# EAGLE board DP_eDP_Adapter_v2.0 (EAGLE 6.4)
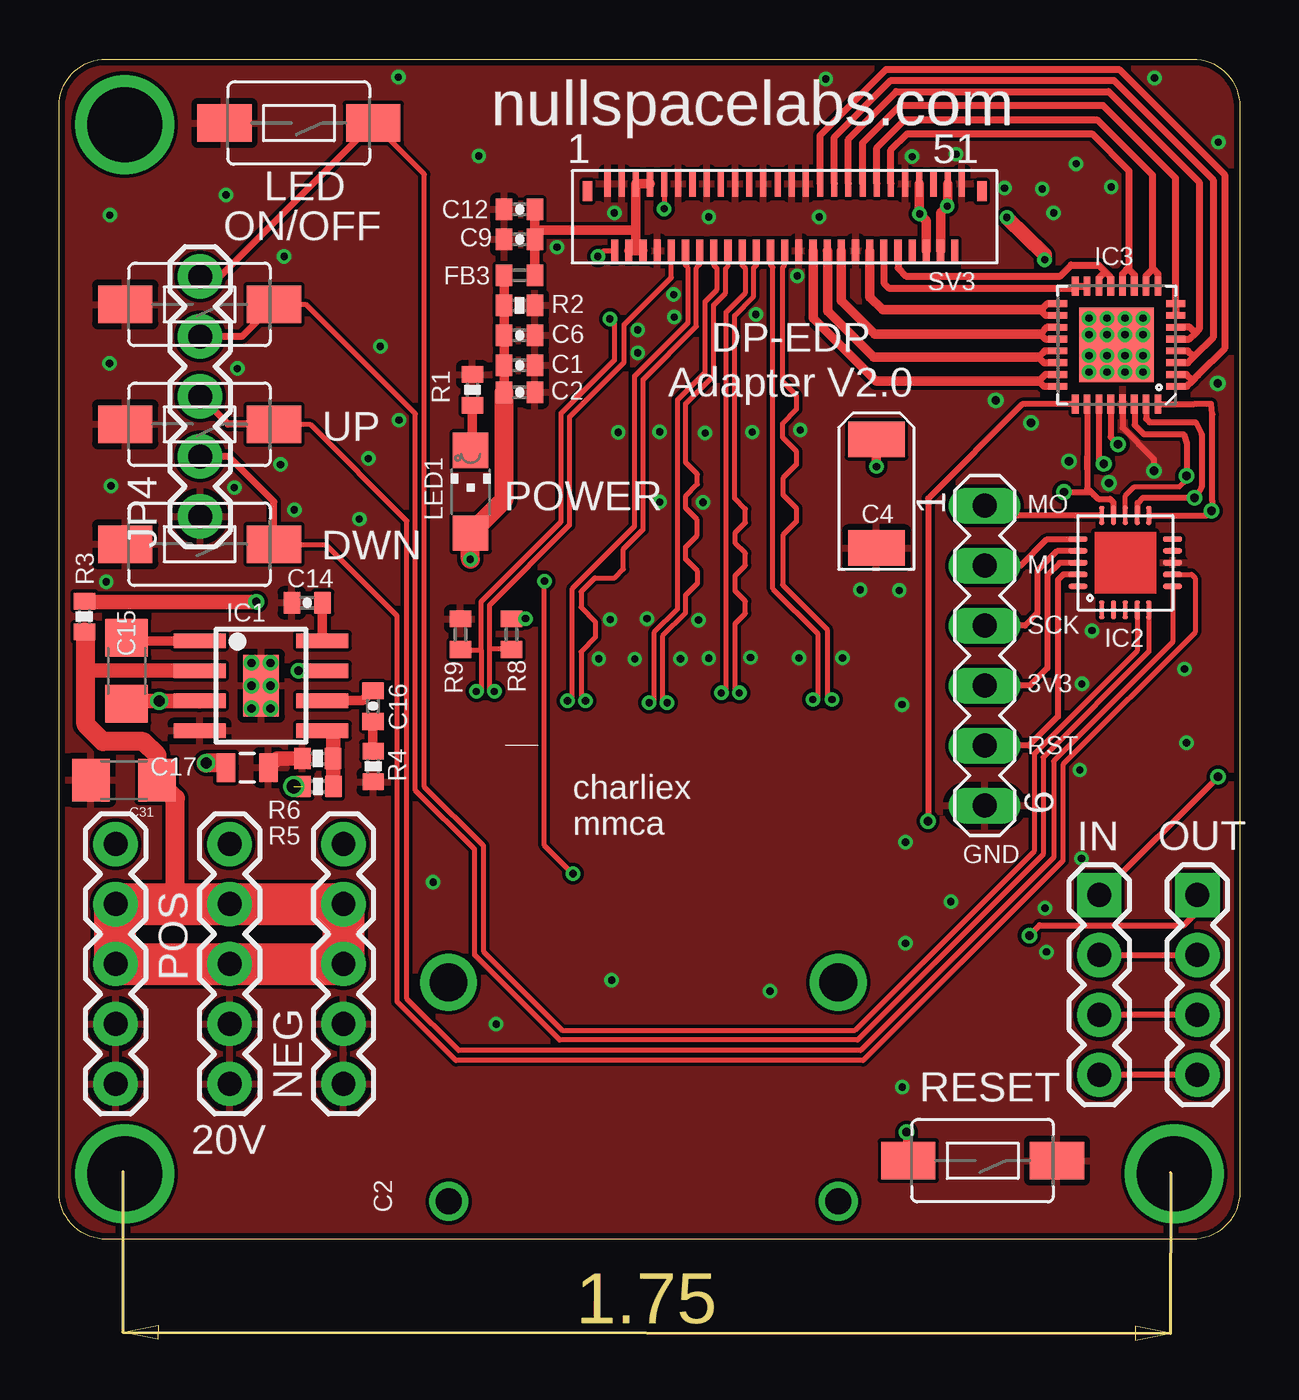
[diagram p0: board, top side]
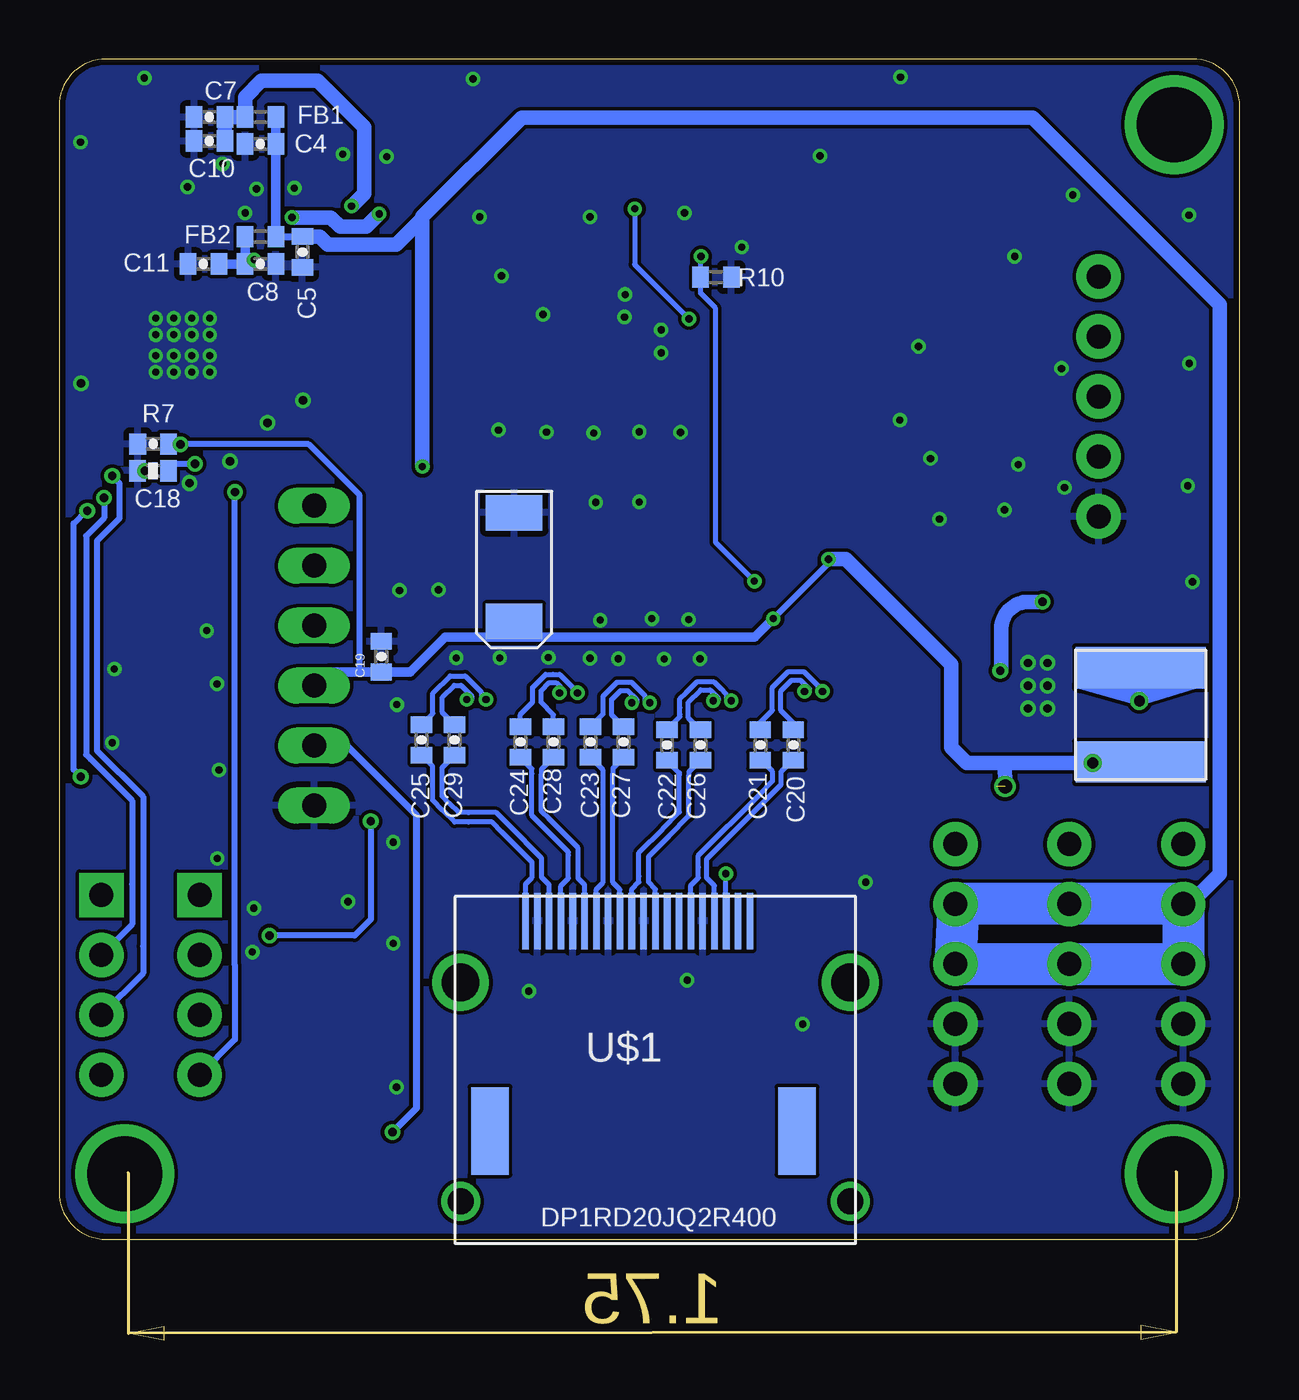
[diagram p1: board, bottom side, seen from below]

Size 50 x 50 mm. Coordinates in mm from the lower left corner, seen from the top.
Outline: 50,48 50,2 arc-90 48,0 2,0 arc-90 0,2 0,48 arc-90 2,50 48,50 arc-90 50,48
Copper layers (1*16): Top 0.035mm / dielectric 1.5mm / Bottom 0.035mm
Design rules "ITEADstudio_DRC *": minimum track width 6mil, minimum drill 12mil, track to track 6mil, track to pad 6mil, pad to pad 6mil, via to via 6mil, smd to smd 0mil, copper to edge 10mil, drill to drill 10mil, minimum pad ring 10mil, minimum via ring 6mil, stop-mask expansion 2mil, vias tented up to drill 20mil, thermal gap 10mil
Net classes: 0 default: width 0.203 mm; 1 DP: width 0.203 mm, drill 0.305 mm, clearance 0.203 mm; 2 Power: width 0.305 mm

## Footprints (pad centres in the part's own frame; a part is rotated, then mirrored left to right if it is on the bottom)
0402-CAP = smd 0.7 x 0.9: 1 -0.65,0; 2 0.65,0
EIA6032 = smd 1.5 x 2.4: P$1 -2.3,0; P$2 2.3,0
1206 = smd 1.6 x 1.8: 1 -1.4,0; 2 1.4,0
0805 = smd 0.8 x 1.2: 1 -0.9,0; 2 0.9,0
SPARKFUN-PASSIVES_0402-CAP = smd 0.7 x 0.9: 1 -0.65,0; 2 0.65,0
R0402 = smd 0.7 x 0.9: 1 -0.65,0; 2 0.65,0
SO8-EP = smd 2.2 x 0.6: 1 -2.6,1.905; 2 -2.6,0.635; 3 -2.6,-0.635; 4 -2.6,-1.905; 5 2.6,-1.905; 6 2.6,-0.635; 7 2.6,0.635; 8 2.6,1.905 | smd 1.505 x 2.613: EP 0,0
MLF20 = smd 0.8 x 0.23: P$1 -2,1; P$2 -2,0.5; P$3 -2,0; P$4 -2,-0.5; P$5 -2,-1; P$11 2,-1; P$12 2,-0.5; P$13 2,0; P$14 2,0.5; P$15 2,1 | smd 0.23 x 0.8: P$6 -1,-2; P$7 -0.5,-2; P$8 0,-2; P$9 0.5,-2; P$10 1,-2; P$16 1,2; P$17 0.5,2; P$18 0,2; P$19 -0.5,2; P$20 -1,2
QFN32_XLP = smd 0.285 x 0.8: 1 -1.75,-2.5; 2 -1.25,-2.5; 3 -0.75,-2.5; 4 -0.25,-2.5; 5 0.25,-2.5; 6 0.75,-2.5; 7 1.25,-2.5; 8 1.75,-2.5; 17 1.75,2.5; 18 1.25,2.5; 19 0.75,2.5; 20 0.25,2.5; 21 -0.25,2.5; 22 -0.75,2.5; 23 -1.25,2.5; 24 -1.75,2.5 | smd 0.8 x 0.285: 9 2.5,-1.75; 10 2.5,-1.25; 11 2.5,-0.75; 12 2.5,-0.25; 13 2.5,0.25; 14 2.5,0.75; 15 2.5,1.25; 16 2.5,1.75; 25 -2.5,1.75; 26 -2.5,1.25; 27 -2.5,0.75; 28 -2.5,0.25; 29 -2.5,-0.25; 30 -2.5,-0.75; 31 -2.5,-1.25; 32 -2.5,-1.75 | smd 3.15 x 3.15: EP 0,0
1X05 = drill 1.016 pad 1.88: 1 0,0; 2 2.54,0; 3 5.08,0; 4 7.62,0; 5 10.16,0
0520C = smd 1.75 x 5.5: P$1 -2,0; P$2 2,0
LED_CHIPLED_1206 = smd 1.5 x 1.5: A 0,-1.75; C 0,1.75
0402-RES = smd 0.7 x 0.9: 1 -0.65,0; 2 0.65,0
TACTILE-SWITCH-1101NE = smd 2.3 x 1.6: P$1 -3.15,0; P$2 3.15,0
1X04 = drill 1.016 pad 1.88 square: 1 0,0 | drill 1.016 pad 1.88: 2 2.54,0; 3 5.08,0; 4 7.62,0
MA06-1 = drill 1.016 long: 1 -6.35,0; 2 -3.81,0; 3 -1.27,0; 4 1.27,0; 5 3.81,0; 6 6.35,0
DP_EDP_ADAPTER_DP_EDP_ADAPTER_EDP_MOLEX = smd 0.26 x 1.1: P$1 7.5,-1.08; P$3 6.9,-1.08; P$5 6.3,-1.08; P$7 5.7,-1.08; P$9 5.1,-1.08; P$11 4.5,-1.08; P$13 3.9,-1.08; P$15 3.3,-1.08; P$17 2.7,-1.08; P$19 2.1,-1.08; P$21 1.5,-1.08; P$23 0.9,-1.08; P$25 0.3,-1.08; P$27 -0.3,-1.08; P$29 -0.9,-1.08; P$31 -1.5,-1.08; P$33 -2.1,-1.08; P$35 -2.7,-1.08; P$37 -3.3,-1.08; P$39 -3.9,-1.08; P$41 -4.5,-1.08; P$43 -5.1,-1.08; P$45 -5.7,-1.08; P$47 -6.3,-1.08; P$49 -6.9,-1.08; P$51 -7.5,-1.08 | smd 0.3 x 0.95: P$2 7.2,1.77; P$4 6.6,1.77; P$6 6,1.77; P$8 5.4,1.77; P$10 4.8,1.77; P$12 4.2,1.77; P$14 3.6,1.77; P$16 3,1.77; P$18 2.4,1.77; P$20 1.8,1.77; P$22 1.2,1.77; P$24 0.6,1.77; P$26 0,1.77; P$28 -0.6,1.77; P$30 -1.2,1.77; P$32 -1.8,1.77; P$34 -2.4,1.77; P$36 -3,1.77; P$38 -3.6,1.77; P$40 -4.2,1.77; P$42 -4.8,1.77; P$44 -5.4,1.77; P$46 -6,1.77; P$48 -6.6,1.77; P$50 -7.2,1.77 | smd 0.4 x 0.85: P$52 8.35,-0.75; P$53 -8.35,-0.75
DP_EDP_ADAPTER_DP_REVERSE_JAE = smd 0.28 x 2.4: P$1 -5.5,0; P$2 -5,0; P$3 -4.5,0; P$4 -4,0; P$5 -3.5,0; P$6 -3,0; P$7 -2.5,0; P$8 -2,0; P$9 -1.5,0; P$10 -1,0; P$11 -0.5,0; P$12 0,0; P$13 0.5,0; P$14 1,0; P$15 1.5,0; P$16 2,0; P$17 2.5,0; P$18 3,0; P$19 3.5,0; P$20 4,0 | drill 1.6: P$22 8.25,-2.6; P$23 -8.25,-2.6 | smd 1.6 x 3.7: P$24 -7,-8.89; P$25 6,-8.89 | drill 1.1: P$26 -8.25,-11.88; P$27 8.25,-11.88

## Placement (x,y rotation side)
C1  0.1uf  [0402-CAP]  19.5,37.03 0 top
C2  1uF  [0402-CAP]  19.5,35.88 0 top
C3  100uF 50V  [EIA6032]  34.61,31.59 270 top
C4  820pF 50V  [0402-CAP]  41.47,46.4 180 bottom
C5  820pF 50V  [0402-CAP]  39.69,41.83 270 bottom
C6  82pF  [0402-CAP]  19.5,38.3 0 top
C7  100pF 50V  [0402-CAP]  43.63,47.54 180 bottom
C8  100pF 50V  [0402-CAP]  41.47,41.32 0 bottom
C9  82pF  [0402-CAP]  19.5,42.36 180 top
C10  820pF 50V  [0402-CAP]  43.63,46.53 180 bottom
C11  820pF 50V  [0402-CAP]  43.88,41.32 180 bottom
C12  1000pF  [0402-CAP]  19.5,43.63 180 top
C14  .1uf 50V  [0402-CAP]  10.51,26.97 180 top
C15  10nF  [1206]  2.86,24.09 270 top
C16  6.8nF  [0402-CAP]  13.29,22.59 270 top
C17  22Uf  [0805]  7.97,19.98 0 top
C18  0.1uF  [0402-CAP]  46.02,33.69 180 bottom
C19  0.1uF  [0402-CAP]  36.35,24.68 90 bottom
C20  [SPARKFUN-PASSIVES_0402-CAP]  18.9,20.94 270 bottom
C21  [SPARKFUN-PASSIVES_0402-CAP]  20.3,20.94 270 bottom
C22  [SPARKFUN-PASSIVES_0402-CAP]  24.25,20.94 90 bottom
C23  [SPARKFUN-PASSIVES_0402-CAP]  27.49,21.06 90 bottom
C24  [SPARKFUN-PASSIVES_0402-CAP]  30.46,21.06 90 bottom
C25  [SPARKFUN-PASSIVES_0402-CAP]  34.65,21.15 90 bottom
C26  [SPARKFUN-PASSIVES_0402-CAP]  22.84,20.94 90 bottom
C27  [SPARKFUN-PASSIVES_0402-CAP]  26.09,21.06 90 bottom
C28  [SPARKFUN-PASSIVES_0402-CAP]  29.06,21.06 90 bottom
C29  [SPARKFUN-PASSIVES_0402-CAP]  33.26,21.15 90 bottom
C30  100uF 50V  [EIA6032]  30.73,28.48 90 bottom
C31  10uF 50V  [1206]  2.75,19.45 180 top
FB1  240ohm-300ma  [R0402]  41.47,47.54 180 bottom
FB2  240ohm-300ma  [R0402]  41.47,42.48 180 bottom
FB3  120ohm-1.5A  [R0402]  19.5,40.84 0 top
IC1  AP6502A  [SO8-EP]  8.55,23.45 0 top
IC2  tiny2313  [MLF20]  45.15,28.66 90 top
IC3  TLC5947XLP  [QFN32_XLP]  44.78,37.89 90 top
JP1  [1X05]  2.39,16.74 270 top
JP2  [1X05]  7.22,16.74 270 top
JP3  [1X05]  12.05,16.74 270 top
JP4  [1X05]  5.98,30.63 90 top
L4  [0520C]  4.2,22.22 270 bottom
LED1  [LED_CHIPLED_1206]  17.43,31.67 0 top
R1  [0402-RES]  17.51,35.99 270 top
R2  47K  [0402-RES]  19.5,39.57 180 top
R3  100K  [0402-RES]  1.07,26.38 270 top
R4  6.8K  [0402-RES]  13.3,20.03 90 top
R5  26.1K  [0402-RES]  10.97,19.18 180 top
R6  10K  [0402-RES]  10.95,20.36 0 top
R7  [0402-RES]  46.02,32.56 0 bottom
R8  100K  [R0402]  19.16,25.64 90 top
R9  100K  [R0402]  17,25.64 270 top
R10  100K  [R0402]  22.18,40.76 180 bottom
S1  SWITCH-MOMENTARY-2-SMD-1101NE  [TACTILE-SWITCH-1101NE]  39.11,3.33 180 top
S2  SWITCH-MOMENTARY-2-SMD-1101NE  [TACTILE-SWITCH-1101NE]  5.95,29.45 180 top
S3  SWITCH-MOMENTARY-2-SMD-1101NE  [TACTILE-SWITCH-1101NE]  5.95,34.52 180 top
S4  SWITCH-MOMENTARY-2-SMD-1101NE  [TACTILE-SWITCH-1101NE]  5.95,39.61 180 top
S5  SWITCH-MOMENTARY-2-SMD-1101NE  [TACTILE-SWITCH-1101NE]  10.15,47.29 180 top
SIG_IN  [1X04]  44.05,14.59 270 top
SIG_OUT  [1X04]  48.2,14.59 270 top
SV1  [MA06-1]  39.2,24.73 270 top
SV3  DP_EDP_ADAPTER_DP_EDP_ADAPTER_EDP_CONNECTOR  [DP_EDP_ADAPTER_DP_EDP_ADAPTER_EDP_MOLEX]  30.73,43.64 180 top
U$1  DP_EDP_ADAPTER_DP1RD20JQ2R400_SINK  [DP_EDP_ADAPTER_DP_REVERSE_JAE]  24.75,13.48 0 bottom

## Library data of the parts
C1-C12 C14-C17 C30 C31 R1-R7 = SparkFun-Passives
C18 C19 = SparkFun
C20-C29 IC1 = DP_eDP_Adapter
FB1-FB3 R8-R10 = rcl
IC2 = NSL_Cylon
IC3 = slice_noshift
JP1-JP4 SIG_IN SIG_OUT = SparkFun-Connectors
L4 = DP_eDP_Adapter_v1.1
LED1 = badge.lbrbadge_2013
S1-S5 = SparkFun-Electromechanical
SV1 = NSL
SV3 U$1 = DP_eDP_Adapter_v2.0

## Nets
20V [Power]: C3.P$1 C4.1 C5.1 C31.1 FB1.1 FB2.1 IC1.2 JP1.2 JP1.3 JP2.2 JP2.3 JP3.2 JP3.3 R3.2
+3V3: C1.1 C2.1 C6.1 C17.1 C18.1 C19.1 C30.P$1 FB3.1 IC2.P$18 IC3.28 L4.P$2 LED1.A R2.2 R5.2 R8.2 SV1.4
AUX_CH_N: C20.1 R8.1 SV3.P$10
AUX_CH_P: C21.1 R9.2 SV3.P$9
AUX_N: C20.2 U$1.P$17
AUX_P: C21.2 U$1.P$15
BLANK: IC2.P$13 IC3.30 SIG_IN.3 SIG_OUT.3
BUTTON_1: IC2.P$7 JP4.2 S2.P$1
BUTTON_2: IC2.P$6 JP4.3 S3.P$1
BUTTON_3: IC2.P$5 JP4.4 S4.P$1
BUTTON_4: IC2.P$4 JP4.5 S5.P$1
GND: C1.2 C2.2 C3.P$2 C4.2 C5.2 C6.2 C7.2 C8.2 C9.2 C10.2 C11.2 C12.2 C14.2 C17.2 C18.2 C19.2 C30.P$2 C31.2 IC1.4 IC1.EP IC2.P$8 IC3.29 JP1.4 JP1.5 JP2.4 JP2.5 JP3.4 JP3.5 JP4.1 R1.1 R2.1 R4.1 R6.1 R7.1 R9.1 R10.1 S1.P$1 S2.P$2 S3.P$2 S4.P$2 S5.P$2 SV1.6 SV3.P$1 SV3.P$3 SV3.P$8 SV3.P$11 SV3.P$15 SV3.P$19 SV3.P$23 SV3.P$27 SV3.P$28 SV3.P$29 SV3.P$36 SV3.P$43 SV3.P$51 U$1.P$2 U$1.P$5 U$1.P$8 U$1.P$11 U$1.P$16
HPD: R10.2 SV3.P$2 U$1.P$18
LANE0_N: C22.2 SV3.P$12
LANE0_P: C26.2 SV3.P$14
LANE1_N: C23.2 SV3.P$16
LANE1_P: C27.2 SV3.P$18
LANE2_N: C24.2 SV3.P$20
LANE2_P: C28.2 SV3.P$22
LANE3_N [DP]: C25.2 SV3.P$24
LANE3_P [DP]: C29.2 SV3.P$26
LED_NEG_1A: IC3.13 IC3.14 SV3.P$42
LED_NEG_1B: IC3.5 IC3.6 SV3.P$35
LED_NEG_2A: IC3.11 IC3.12 SV3.P$41
LED_NEG_2B: IC3.19 IC3.20 SV3.P$34
LED_NEG_3A: IC3.15 IC3.16 SV3.P$40
LED_NEG_3B: IC3.3 IC3.4 SV3.P$33
LED_NEG_4A: IC3.9 IC3.10 SV3.P$39
LED_NEG_4B: IC3.21 IC3.22 SV3.P$32
LED_NEG_5A: IC3.17 IC3.18 SV3.P$38
LED_NEG_5B: IC3.1 IC3.2 SV3.P$31
LED_NEG_6A: IC3.7 IC3.8 SV3.P$37
LED_NEG_6B: IC3.23 IC3.24 SV3.P$30
LED_POS_1: C7.1 C10.1 FB1.2 SV3.P$48 SV3.P$49
LED_POS_2: C8.1 C11.1 FB2.2 SV3.P$45 SV3.P$46
MISO: IC2.P$16 SV1.2
MOSI: IC2.P$15 SV1.1
N$2: IC1.7 R3.1
N$3: LED1.C R1.2
N$3_N [DP]: C22.1 U$1.P$10
N$3_P [DP]: C26.1 U$1.P$12
N$5: IC2.P$10
N$7: C14.1 IC1.8
N$8: C16.1 IC1.6
N$9: C16.2 R4.2
N$10: IC1.5 R5.1 R6.2
N$13: IC3.27 R7.2
N$14: C15.2 IC1.3 L4.P$1
N$15_N [DP]: C23.1 U$1.P$7
N$15_P [DP]: C27.1 U$1.P$9
N$17_N [DP]: C24.1 U$1.P$4
N$17_P [DP]: C28.1 U$1.P$6
N$18: C15.1 IC1.1
N$19_N [DP]: C25.1 U$1.P$1
N$19_P [DP]: C29.1 U$1.P$3
RST: IC2.P$19 S1.P$2 SV1.5
SCK: IC2.P$17 SV1.3
SCLK: IC2.P$12 IC3.31 SIG_IN.2 SIG_OUT.2
SIN: IC2.P$11 IC3.32 SIG_IN.1
SOUT: IC3.25 SIG_OUT.1
VIN: C9.1 C12.1 FB3.2 SV3.P$4 SV3.P$5 SV3.P$6 SV3.P$7
XLAT: IC2.P$14 IC3.26 SIG_IN.4 SIG_OUT.4

## Tracks (layer width: path | path; a pad name or v marks a point on that pad's centre or on a via)
20V  (via drill 0.3)
  Top 0.406: 2.37,11.69 JP1.3 | C3.P$1 v34.61,32.73
  Top 0.61: 5.2,14.22 5.12,14.22 4.43,14.22 4.43,14.21 7.8,14.21 | 5.2,14.29 arc-90 5.01,14.48 4.92,14.57 | IC1.2 2,24.09 1.16,24.09 1.14,24.06
  Top 0.813: 4.92,14.57 4.92,18.68 C31.1 4.15,20.51 3.57,21.09 1.86,21.09 1.14,21.81 1.14,24.06 1.14,25.67 R3.2
  Top 1.016: 5.2,14.29 5.12,14.22
  Top 1.778: JP1.2 JP2.2 7.8,14.21 JP3.2 JP3.3 JP2.3 5.04,11.66 JP1.3 | 2.37,14.18 2.37,11.69
  Bottom 0.305: FB2.1 C5.1
  Bottom 0.406: FB1.1 C4.1 FB2.1 | 2.36,14.22 2.38,14.22 JP1.2 | 34.61,43.31 34.62,43.31 34.62,43.23
  Bottom 0.61: 40.81,47.56 FB1.1 40.82,47.55 | JP1.2 2.13,14.21 0.84,15.49 0.84,39.59 8.77,47.52 30.41,47.52 34.61,43.31 v34.61,32.73 | 34.62,43.23 35.72,42.13 38.61,42.13 38.96,42.48 C5.1
  Bottom 1.778: 2.36,14.22 11.93,14.22 11.93,14.18 11.92,14.18 JP3.3 JP1.3 2.38,14.14
+3V3  (via drill 0.3, 0.36, 0.46, 0.6)  (1 unrouted)
  Top 0.254: IC3.28 44.53,33.99 v44.85,33.67 | IC2.P$18 43.14,28.66 42.37,28.66 41.85,28.14 41.85,24.2 41.11,23.46 SV1.4 | R8.2 v19.75,26.3
  Top 0.406: FB3.1 R2.2 C6.1 C1.1 C2.1
  Top 0.61: R5.2 10.32,19.34
  Top 0.813: v17.42,28.81 17.42,29.91 LED1.A 18.85,31.34 C2.1 | C17.1 6.98,20.17 v6.23,20.17
  Bottom 0.254: C18.1 45.35,33.67 v44.85,33.67 44.84,33.69 39.43,33.69 37.27,31.53 37.27,24.02 | v19.75,26.3 17.42,28.63 v17.42,28.81
  Bottom 0.305: 33.65,25.52 30.84,25.52 30.75,25.61 30.75,26.15 C30.P$1
  Bottom 0.406: C19.1 38.62,24.03 SV1.4 | 37.27,24.02 36.36,24.02 C19.1 | 4.24,20.17 arc-90 L4.P$2 | v19.75,26.3 20.53,25.52 33.65,25.52 35.14,24.03 C19.1
  Bottom 0.61: 12.22,20.83 11.56,20.17 9.96,20.17 | 4.24,20.17 arc-90 L4.P$2 arc90 4.24,20.17 | 4.24,20.17 arc90 4.34,20.07 | 9.96,20.17 v6.23,20.17 4.24,20.17 | 12.22,20.83 12.21,20.84 | v9.94,19.18 9.95,20.17 9.96,20.17 | 12.22,20.83 12.22,24.35 13.12,25.24 16.68,28.81 v17.42,28.81
AUX_CH_N  (via drill 0.3)
  Top 0.203: v18.43,23.21 18.23,23.21 18.23,25 | SV3.P$10 25.93,40.75 23.93,38.75 23.93,37.16 21.61,34.83 21.61,30.25 18.23,26.87 18.23,25 | R8.1 19.14,25 18.23,25
  Bottom 0.203: C20.1 18.9,21.88 19.44,22.41 19.44,23.24 18.98,23.69 18.61,23.69 18.23,23.31 18.23,23.21 v18.43,23.21
AUX_CH_P  (via drill 0.3)
  Top 0.203: v17.67,23.21 17.88,23.21 17.88,24.98 | SV3.P$9 v25.62,43.66 | v23.32,38.99 23.51,38.8 23.51,37.24 21.25,34.98 21.25,30.39 17.88,27.02 17.88,24.98 | R9.2 17.88,24.98
  Bottom 0.203: C21.1 20.3,21.9 19.79,22.41 19.79,23.39 19.13,24.05 18.46,24.05 17.88,23.46 17.88,23.21 v17.67,23.21 | v25.62,43.66 25.62,41.29 v23.32,38.99
AUX_N
  Bottom 0.203: U$1.P$17 22.25,14.98 22.57,15.31 22.57,15.77 22.57,16.11 20.09,18.6 19.43,19.26 19.43,19.82 18.96,20.29 C20.2
AUX_P
  Bottom 0.203: U$1.P$15 23.25,14.99 22.93,15.31 22.93,15.77 22.93,16.26 20.34,18.85 19.78,19.41 19.78,19.82 20.25,20.29 C21.2
BLANK  (via drill 0.36)
  Top 0.203: IC2.P$13 45.15,31.5 45.54,31.88 47.44,31.88 47.75,32.19 v47.75,32.34
  Top 0.254: IC3.30 45.55,35.37 45.55,34.5 45.94,34.11 47.62,34.11 47.76,33.7 47.76,32.35 v47.75,32.34 | SIG_OUT.3 SIG_IN.3
  Bottom 0.254: v47.75,32.34 47.44,32.04 47.44,31.11 47.44,30.54 48.39,29.59 48.39,20.71 46.44,18.75 46.44,12.43 46.44,11.27 SIG_OUT.3
BUTTON_1
  Top 0.203: IC2.P$7 47.96,28.16 48.11,28.01 48.11,25.71 42.51,20.11 42.51,16.03 34.05,7.58 16.81,7.58 14.32,10.06 14.32,26.41 11.31,29.42 9.12,29.42 S2.P$1
  Top 0.305: S2.P$1 9.1,31.25 7.18,33.17 JP4.2
BUTTON_2
  Top 0.203: IC2.P$6 47.15,25.3 42.12,20.26 42.12,16.17 33.94,8 16.92,8 14.73,10.19 14.73,30.44 10.65,34.51 9.11,34.51 S3.P$1
  Top 0.305: S3.P$1 7.16,34.52 JP4.3
BUTTON_3
  Top 0.203: IC2.P$5 46.15,24.89 41.67,20.41 41.67,16.3 33.81,8.44 21.2,8.44 17.6,12.05 17.6,16.52 15.09,19.02 15.09,34.97 10.47,39.59 9.11,39.59 S4.P$1
  Top 0.305: S4.P$1 7.74,38.25 JP4.4
BUTTON_4
  Top 0.203: IC2.P$4 45.65,24.92 41.29,20.57 41.29,16.44 33.71,8.86 21.3,8.86 17.96,12.2 17.96,16.68 15.47,19.17 15.47,45.12 14.47,46.12 14.07,46.53 S5.P$1
  Top 0.305: S5.P$1 6.8,40.79 JP4.5
GND  (via drill 0.3, 0.36)
  Top 0.254: IC3.29 45.03,34.38 46.36,33.05 v46.36,32.56
  Top 0.61: C17.2 9.25,20.36 R6.1
  other vias: 44.47,32.04 42.77,32.96 41.17,34.59 49.07,36.25 32.47,49.16 17.77,45.89 35.58,27.49 7.07,44.24 14.37,49.23 8.15,24.42 8.96,24.42 8.15,22.49 8.15,23.45 8.96,22.49 8.96,23.45 21.09,42.03 36.13,45.87 43.62,39.02 44.38,39.02 45.14,39.02 45.9,39.02 43.62,38.32 44.38,38.32 45.14,38.32 45.9,38.32 27.51,43.31 32.19,43.31 33.18,24.63 33.93,27.51 31.34,24.63 2.15,43.39 13.61,37.83 13.1,33.08 12.72,30.51 9.96,30.91 14.4,34.7 15.84,15.13 18.51,9.11 35.69,22.65 35.85,12.54 37.76,14.31 47.66,24.16 41.75,14.03 43.31,23.53 43.75,25.79 43.3,16.14 41.81,12.17 35.85,16.82 23.4,10.98 30.11,10.51 9.53,41.64 7.55,36.89 9.38,32.82 7.42,31.85 2,27.86 37.98,45.97 40.04,44.53 41.64,44.49 42.12,43.48 46.39,49.19 49.09,46.48 2.14,37.1 2.2,31.92 35.71,6.45 43.62,37.43 44.38,37.43 45.14,37.43 45.9,37.43 43.62,36.73 44.38,36.73 45.14,36.73 45.9,36.73 29.28,24.64 27.51,24.62 26.32,24.59 24.38,24.58 22.85,24.59 39.67,35.54 27.27,31.22 27.36,34.16 25.43,34.21 25.43,31.24 29.36,34.19 31.39,34.28 23.68,34.18 29.51,39.19 26.05,39.07 24.5,38.53 26.03,40.02 24.5,37.55 31.26,40.81 23.34,26.26 24.9,26.3 27.08,26.23 23.51,43.48 43.07,45.56 44.56,44.58 47.75,21.04 43.22,19.88
  pour Top: -0.91,50.91 51.42,50.91 51.42,-0.91 -0.91,-0.91
  pour Bottom: 51.94,51.34 51.94,-1.53 -1.42,-1.47 -1.42,51.4
HPD  (via drill 0.3)
  Top 0.203: v22.82,41.64 23.05,41.87 SV3.P$2 | v21.76,15.49 20.55,16.69 v20.55,27.88
  Bottom 0.203: v22.82,41.64 22.82,40.78 R10.2 22.83,40.08 22.19,39.44 22.19,29.52 v20.55,27.88 | U$1.P$18 21.76,13.5 v21.76,15.49
LANE0_N  (via drill 0.3)
  Top 0.203: v21.53,22.82 21.74,22.82 21.74,27.58 24.36,30.2 24.36,36.55 26.64,38.83 26.64,41.15 26.53,41.27 SV3.P$12
  Bottom 0.203: C22.2 23.7,22.13 23.7,22.24 23.7,22.51 23.7,22.9 23.44,23.17 23.23,23.37 22.98,23.63 22.59,23.63 22.29,23.63 22,23.35 21.74,23.08 21.74,22.82 v21.53,22.82
LANE0_P  (via drill 0.3)
  Top 0.203: 22.09,22.82 v22.3,22.82 22.1,22.82 22.1,24.9 22.71,25.51 22.71,26.14 22.1,26.77 22.1,27.44 22.69,28.02 23.53,28.02 23.89,28.39 23.89,29.23 24.72,30.06 24.72,36.41 26.99,38.68 26.99,41.15 27.13,41.29 SV3.P$14
  Bottom 0.203: C26.2 23.35,22.09 23.35,22.75 22.83,23.27 22.43,23.27 22.09,22.93 22.09,22.82 v22.3,22.82
LANE1_N  (via drill 0.3)
  Top 0.203: v24.99,22.73 25.19,22.73 25.19,25.7 26.18,26.69 26.18,35.55 27.36,36.73 27.36,39.73 27.87,40.24 27.87,41.13 27.73,41.27 SV3.P$16
  Bottom 0.203: C23.2 26.96,22.25 26.96,23.02 26.37,23.6 25.77,23.6 25.19,23.03 25.19,22.73 v24.99,22.73
LANE1_P  (via drill 0.3)
  Top 0.203: v25.75,22.73 25.55,22.73 25.55,25.55 26.54,26.54 26.54,27.29 27.05,27.79 27.05,28.3 26.54,28.81 26.54,29.33 27.02,29.81 27.02,30.49 26.54,30.98 26.54,31.48 27.03,31.98 27.03,32.42 26.54,32.91 26.54,35.4 27.72,36.59 27.72,39.58 28.23,40.09 28.23,41.13 28.33,41.23 SV3.P$18
  Bottom 0.203: C27.2 26.6,22.22 26.6,22.87 26.22,23.25 25.91,23.25 25.55,22.88 25.55,22.73 v25.75,22.73
LANE2_N  (via drill 0.3)
  Top 0.203: v28.05,23.15 28.25,23.15 28.25,39.28 29.05,40.09 29.05,41.14 28.93,41.27 SV3.P$20
  Bottom 0.203: C24.2 30.46,22.23 29.94,22.75 29.94,23.12 29.94,23.39 29.67,23.65 29.39,23.93 29.09,23.93 28.8,23.93 28.55,23.68 28.25,23.39 28.25,23.15 v28.05,23.15
LANE2_P  (via drill 0.3)
  Top 0.203: 28.63,23.15 v28.81,23.15 | SV3.P$22 29.53,41.26 29.41,41.14 29.41,39.94 28.61,39.14 28.61,31.4 29.06,30.94 29.06,30.36 28.64,29.94 28.64,29.48 29.06,29.06 29.06,28.54 28.63,28.11 28.63,27.46 29.06,27.03 29.06,26.51 28.63,26.08 28.63,23.15 | 28.61,23.15 28.63,23.15
  Bottom 0.203: C28.2 29.06,22.23 29.59,22.75 29.59,23.24 29.24,23.58 28.95,23.58 28.61,23.24 28.61,23.15 v28.81,23.15
LANE3_N  (via drill 0.3)
  Top 0.203: v31.92,22.87 32.12,22.87 32.12,25.66 30.23,27.56 30.23,41.18 30.13,41.28 SV3.P$24
  Bottom 0.203: C25.2 34.17,22.28 34.17,23.14 33.44,23.87 32.8,23.87 32.12,23.19 32.12,22.87 v31.92,22.87
LANE3_P  (via drill 0.3)
  Top 0.203: v32.73,22.87 32.53,22.87 32.53,25.83 30.64,27.73 30.65,27.74 30.65,29.83 31.22,30.4 31.22,30.97 30.65,31.54 30.65,32.24 31.22,32.81 31.22,33.38 30.64,33.97 30.64,34.56 31.24,35.16 31.24,35.73 30.64,36.33 30.64,41.18 30.73,41.27 SV3.P$26
  Bottom 0.203: C29.2 33.76,22.31 33.76,22.97 33.27,23.46 32.97,23.46 32.53,23.02 32.53,22.87 v32.73,22.87
LED_NEG_1A
  Top 0.305: SV3.P$42 35.53,41.14 35.86,40.81 42.4,40.81 42.86,41.27 44.02,41.27 44.3,40.99 | 44.3,40.99 44.03,40.72 IC3.14 | IC3.13 44.53,40.76 44.3,40.99
LED_NEG_1B
  Top 0.305: SV3.P$35 33.43,46.6 35.45,48.62 44.44,48.62 48.28,44.79 48.28,38.55 48.13,38.4 | 48.13,38.4 47.89,38.63 IC3.6 | IC3.5 47.86,38.13 48.13,38.4
LED_NEG_2A
  Top 0.305: SV3.P$41 35.23,46.15 35.91,46.83 43.75,46.83 45.31,45.27 45.31,41.18 | 45.31,41.18 45.31,41.09 45.53,40.86 IC3.11 | IC3.12 45.03,40.91 45.31,41.18
LED_NEG_2B
  Top 0.305: IC3.20 41.76,38.13 41.55,38.35 41.84,38.63 IC3.19
  Top 0.406: SV3.P$34 33.13,39.77 34.55,38.35 41.55,38.35
LED_NEG_3A
  Top 0.305: IC3.15 IC3.16 42.95,40.3 35.13,40.3 34.93,40.51 SV3.P$40
LED_NEG_3B
  Top 0.305: SV3.P$33 32.83,46.7 35.22,49.09 44.67,49.09 48.88,44.89 48.88,38.21 48.05,37.38 | 48.05,37.38 47.8,37.63 IC3.4 | IC3.3 47.8,37.13 48.05,37.38
LED_NEG_4A
  Top 0.305: SV3.P$39 34.63,46.25 35.81,47.43 43.96,47.43 46.3,45.09 46.3,41.14 46.33,41.11 | 46.33,41.11 46.53,40.91 IC3.9 | IC3.10 46.03,40.81 46.33,41.11
LED_NEG_4B
  Top 0.305: IC3.22 41.71,37.13 41.47,37.37 41.74,37.63 IC3.21
  Top 0.406: SV3.P$32 32.54,41.86 32.54,39.33 34.5,37.37 41.47,37.37
LED_NEG_5A
  Top 0.305: IC3.18 41.78,39.13 41.53,39.38 | IC3.17 41.84,39.63 41.59,39.38 | SV3.P$38
  Top 0.406: 41.59,39.38 41.53,39.38 34.88,39.38 34.34,39.92 SV3.P$38
LED_NEG_5B
  Top 0.305: SV3.P$31 32.23,46.77 35.02,49.56 44.89,49.56 49.36,45.09 49.36,37.74 48.22,36.6 48,36.38 | 48,36.38 47.74,36.63 IC3.2 | IC3.1 47.76,36.13 48,36.38
LED_NEG_6A
  Top 0.305: SV3.P$37 34.03,46.45 35.62,48.04 44.2,48.04 47.28,44.96 IC3.8 IC3.7
LED_NEG_6B
  Top 0.305: IC3.24 41.7,36.13 41.48,36.35 41.77,36.63 IC3.23
  Top 0.406: SV3.P$30 31.93,39.03 34.6,36.35 41.48,36.35
LED_POS_1  (via drill 0.3)
  Top 0.406: SV3.P$49 37.63,43.79 v37.61,43.77 37.33,43.49 SV3.P$48
  Bottom 0.61: C10.1 C7.1 FB1.2 42.12,48.39 41.43,49.08 39.05,49.08 37.08,47.11 37.08,44.3 v37.61,43.77
LED_POS_2  (via drill 0.3)
  Top 0.406: SV3.P$45 36.43,43.45 v36.44,43.44 36.73,43.16 SV3.P$46
  Top 0.61: v40.14,43.29 41.74,41.71 v41.74,41.5
  Bottom 0.406: FB2.2 C8.1 C11.1 | 41.79,41.48 arc90 v41.74,41.5
  Bottom 0.61: C8.1 41.79,41.48 | v36.44,43.44 36.99,42.89 38.09,42.89 38.49,43.29 v40.14,43.29
MISO
  Top 0.254: IC2.P$16 43.12,29.64 41.81,29.64 40.72,28.54 SV1.2
MOSI
  Top 0.254: IC2.P$15 39.61,30.66 SV1.1
N$1  (via drill 3.17)
  other vias: 47.23,2.77
N$2  (via drill 0.36)
  Top 0.61: R3.1 arc90 1.1,27.01 v8.35,27.01 | v10.14,24.09 IC1.7 | IC1.7 11.17,24.09 arc-90 IC1.7
  Bottom 0.61: v8.35,27.01 8.95,27.01 arc-90 10.1,25.85 10.1,24.14 arc90 v10.14,24.09
N$3
  Top 0.406: R1.2 17.51,33.49 LED1.C
N$3_N
  Bottom 0.203: U$1.P$10 25.75,14.83 25.45,15.13 25.45,15.37 25.45,16.38 24.45,17.38 23.73,18.1 23.73,19.68 23.73,19.77 C22.1
N$3_P
  Bottom 0.203: U$1.P$12 24.75,14.84 25.04,15.13 25.04,15.37 25.04,16.22 24.16,17.1 23.32,17.93 23.32,19.68 23.32,19.8 C26.1
N$4  (via drill 3.17)
  other vias: 2.77,47.23
N$6  (via drill 3.17)
  other vias: 2.77,2.77
N$7
  Top 0.406: C14.1 11.15,26.72 IC1.8
N$8
  Top 0.406: IC1.6 12.87,22.82 C16.1
N$9
  Top 0.406: C16.2 13.29,20.7 R4.2
N$10
  Top 0.305: 11.97,21.56 11.96,21.55
  Top 0.406: IC1.5 11.6,21.55 11.96,21.55
  Top 0.61: R5.1 11.6,19.34 R6.2 11.6,21.55 IC1.5
N$13  (via drill 0.36)
  Top 0.254: IC3.27 44.03,33.05 v44.24,32.85
  Bottom 0.254: v44.24,32.85 45.08,32.85 R7.2
N$14  (via drill 0.46)
  Top 0.305: 5.93,22.79 IC1.3
  Top 0.61: C15.2 arc-90 2.98,22.8 v4.25,22.8 5.91,22.8 arc-90 5.93,22.79
  Bottom 0.406: L4.P$1 1.7,24.22 1.7,23.58 v4.25,22.8 v4.26,22.8 | 6.74,23.5 v4.26,22.8 | v4.26,22.8 5.39,23.36 3.36,23.34 4.53,23.13 4.26,22.83
  Bottom 0.61: v4.25,22.8 arc-90 4.2,22.85
N$15_N
  Bottom 0.203: U$1.P$7 27.25,14.83 26.96,15.12 26.96,19.73 26.96,19.88 C23.1
N$15_P
  Bottom 0.203: U$1.P$9 26.25,14.82 26.55,15.12 26.55,19.73 26.55,19.96 C27.1
N$17_N
  Bottom 0.203: U$1.P$4 28.75,14.98 28.43,15.3 28.43,16.26 28.43,16.41 29.54,17.52 29.98,17.96 29.98,19.72 29.98,19.93 C24.1
N$17_P
  Bottom 0.203: U$1.P$6 27.75,15.02 28.02,15.3 28.02,16.26 28.02,16.57 29.25,17.8 29.57,18.12 29.57,19.72 29.57,19.91 C28.1
N$18
  Top 0.406: 5.96,25.36 IC1.1 2.99,25.36 arc-90 C15.1
N$19_N
  Bottom 0.203: C25.1 34.18,20.03 34.18,19.88 34.18,18.6 33.75,18.18 33.25,17.67 32.67,17.67 31.66,17.67 31.23,17.24 29.97,15.97 29.97,15.75 29.97,15.34 30.25,15.05 U$1.P$1
N$19_P
  Bottom 0.203: C29.1 33.78,19.98 33.78,19.88 33.78,18.77 33.47,18.46 33.08,18.08 32.67,18.08 31.49,18.08 30.94,17.52 29.56,16.14 29.56,15.75 29.56,15.34 29.25,15.02 U$1.P$3
RST  (via drill 0.36)
  Top 0.254: 40.63,20.92 SV1.5 41.07,20.92 42.3,22.14 42.3,27.93 42.53,28.16 IC2.P$19 | 35.88,3.41 S1.P$2
  Top 0.305: v35.88,4.54 35.88,3.41
  Bottom 0.254: SV1.5 37.81,20.92
  Bottom 0.305: 37.81,20.92 34.87,17.98 34.87,5.56 v35.88,4.54
SCK
  Top 0.254: IC2.P$17 43.14,29.15 42.26,29.15 41.43,28.33 41.43,26.52 40.91,26 SV1.3
SCLK  (via drill 0.36)
  Top 0.254: IC3.31 46.03,34.77 46.18,34.61 48.13,34.61 48.38,34.11 48.38,31.87 48.13,31.41 v48.09,31.41 45.89,31.41 45.68,31.2 45.68,30.69 IC2.P$12 | SIG_IN.2 SIG_OUT.2
  Bottom 0.254: v48.09,31.41 48.09,30.56 48.85,29.8 48.85,20.53 48.66,20.34 46.91,18.59 46.91,15.04 46.91,13.34 SIG_OUT.2
SIN  (via drill 0.36)
  Top 0.254: IC2.P$11 | IC3.32 48.08,35.38 48.79,35.38 48.84,34.96 48.84,31.27 48.84,30.89 v48.81,30.86 48.61,30.66 IC2.P$11 | IC2.P$11 48.6,30.66 | v49.08,19.59 44.08,14.59 SIG_IN.1
  Bottom 0.254: v49.08,19.59 49.38,19.89 49.38,30.32 48.84,30.86 v48.81,30.86
SOUT  (via drill 0.36)
  Top 0.254: IC3.25 43.02,35.38 40.79,35.38 36.8,31.39 v36.8,17.71 | v41.09,12.87 41.52,13.3 47.63,13.3 48.2,13.88 SIG_OUT.1
  Bottom 0.254: v36.8,17.71 36.8,13.56 37.48,12.87 v41.09,12.87
VIN
  Top 0.305: C9.1 20.15,42.75
  Top 0.406: FB3.2 C9.1 C12.1 | SV3.P$7 SV3.P$5 24.43,42.75 | SV3.P$6 SV3.P$4 24.43,41.87 24.43,42.75 | 20.15,42.75 24.43,42.75
XLAT  (via drill 0.36)
  Top 0.254: IC3.26 43.53,33.14 | IC2.P$14 44.65,31.22 44.51,31.36 44,31.36 43.92,31.45 | 43.53,33.14 43.53,31.82 43.81,31.54 43.82,31.54 43.92,31.45 | SIG_OUT.4 SIG_IN.4 | 43.53,32.64 43.53,33.14 | v42.55,31.66 43.71,31.66 43.92,31.45
  Bottom 0.254: v42.55,31.66 42.55,11.61 42.55,10.47 42.55,8.46 SIG_IN.4

## Text on the board
tPlace: nullspacelabs.com | LED | ON/OFF | DP-EDP / Adapter V2.0 | UP | POWER | MO | C4 | DWN | MI | SCK | 3V3 | RST | charliex / mmca | GND | IN | OUT | POS | NEG | RESET | 20V | C2